# Altium PCB PCB3.PcbDoc (part 2 of 2)
Units mil, origin at the board's own origin, x right, y up, seen from the top; angles counter-clockwise.
Board outline 2978 x 3898 mil, 2 copper layers (Top Layer, Bottom Layer); 131 components, 87 nets, 395 pads, 3442 vias.
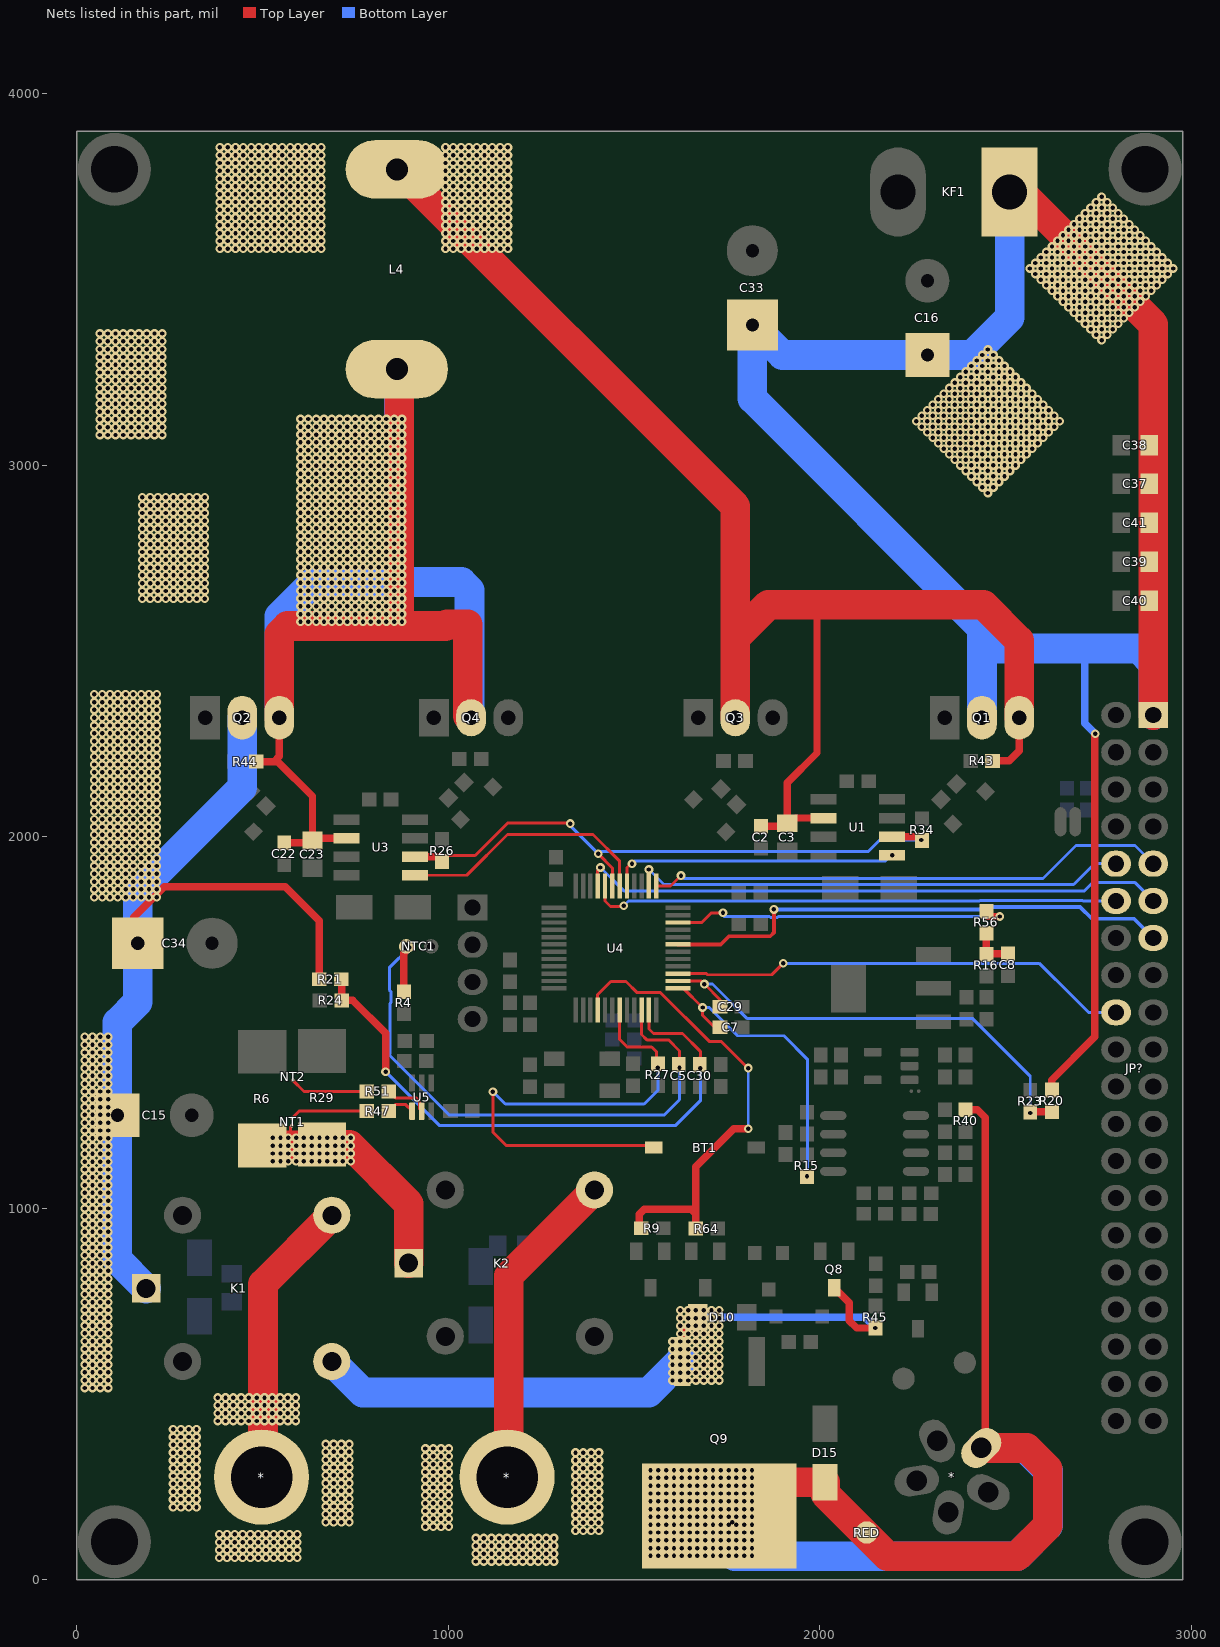
[diagram p2: the nets of this part, all layers, seen from the top]

## Via types
v1: diameter 23.62, hole 11.81, Top Layer to Bottom Layer, tented both sides, 2994 vias
v2: diameter 23.62, hole 11.81, Top Layer to Bottom Layer, 448 vias

## Nets (pads, with @x,y where several pads share a name; then routed paths per layer and width w, separated by ;. In a path a pad name is that pad's centre, name@x,y a point inside that pad or via, vN(x,y) a via of type N, cw(c..) or ccw(c..) an arc to the next point about the centre after c; other vN are vias at no path point) (continued)
POWER: C16.1 C33.1 C37.1 C38.1 C39.1 C40.1 C41.1 JP?.1 KF1.1 Q1.2 R20.1 | length 5920.8
  Top Layer w20: R20.1@2625,1318.06 2625,1345 2741,1461 2741,2276 v1(2742,2277) ; JP?.1@2898,2318 JP?.1@2898,2327
  Top Layer w80: KF1.1@2512,3765 2898,3379 JP?.1@2898,2327
  Bottom Layer w20: 2714,2506 2714,2305 v1(2742,2277)
  Bottom Layer w80: Q1.2@2437,2320 2437,2506 ; KF1.1@2512,3765 2512,3397 2411,3296 C16.1@2290.27,3296 1900,3296 C33.1@1819,3377 1819,3179 2437,2561 2437,2506 ; JP?.1@2898,2327 2898,2466 2858,2506 2714,2506 2437,2506
  other v1: 2453.04,2924.96 2438.19,2939.81 2467.89,2939.81 2423.34,2954.66 2453.04,2954.66 2482.74,2954.66 2408.49,2969.51 2438.19,2969.51 2467.89,2969.51 2497.59,2969.51 2393.64,2984.36 2423.34,2984.36 2453.04,2984.36 2482.74,2984.36 2512.44,2984.36 2378.79,2999.21 2408.49,2999.21 2438.19,2999.21 2467.89,2999.21 2497.59,2999.21 2527.29,2999.21 2363.94,3014.06 2393.64,3014.06 2423.34,3014.06 2453.04,3014.06 2482.74,3014.06 2512.44,3014.06 2542.14,3014.06 2349.1,3028.9 2378.79,3028.9 2408.49,3028.9 2438.19,3028.9 2467.89,3028.9 2497.59,3028.9 2527.29,3028.9 2556.98,3028.9 2334.25,3043.75 2363.94,3043.75 2393.64,3043.75 2423.34,3043.75 2453.04,3043.75 2482.74,3043.75 2512.44,3043.75 2542.14,3043.75 2571.83,3043.75 2319.4,3058.6 2349.1,3058.6 2378.79,3058.6 2408.49,3058.6 2438.19,3058.6 2467.89,3058.6 2497.59,3058.6 2527.29,3058.6 2556.98,3058.6 2586.68,3058.6 2304.55,3073.45 2334.25,3073.45 2363.94,3073.45 2393.64,3073.45 2423.34,3073.45 2453.04,3073.45 2482.74,3073.45 2512.44,3073.45 2542.14,3073.45 2571.83,3073.45 2601.53,3073.45 2289.7,3088.3 2319.4,3088.3 2349.1,3088.3 2378.79,3088.3 2408.49,3088.3 2438.19,3088.3 2467.89,3088.3 2497.59,3088.3 2527.29,3088.3 2556.98,3088.3 2586.68,3088.3 2616.38,3088.3 2274.85,3103.15 2304.55,3103.15 2334.25,3103.15 2363.94,3103.15 2393.64,3103.15 2423.34,3103.15 2453.04,3103.15 2482.74,3103.15 2512.44,3103.15 2542.14,3103.15 2571.83,3103.15 2601.53,3103.15 2631.23,3103.15 2260,3118 2260,3118 2289.7,3118 2319.4,3118 2349.1,3118 2378.79,3118 2408.49,3118 2438.19,3118 2467.89,3118 2497.59,3118 2527.29,3118 2556.98,3118 2586.68,3118 2616.38,3118 2646.08,3118 2274.85,3132.85 2274.85,3132.85 2304.55,3132.85 2334.25,3132.85 2363.94,3132.85 2393.64,3132.85 2423.34,3132.85 2453.04,3132.85 2482.74,3132.85 2512.44,3132.85 2542.14,3132.85 2571.83,3132.85 2601.53,3132.85 2631.23,3132.85 2289.7,3147.7 2289.7,3147.7 2319.4,3147.7 2349.1,3147.7 2378.79,3147.7 2408.49,3147.7 2438.19,3147.7 2467.89,3147.7 2497.59,3147.7 2527.29,3147.7 2556.98,3147.7 2586.68,3147.7 2616.38,3147.7 2304.55,3162.55 2304.55,3162.55 2334.25,3162.55 2363.94,3162.55 2393.64,3162.55 2423.34,3162.55 2453.04,3162.55 2482.74,3162.55 2512.44,3162.55 2542.14,3162.55 2571.83,3162.55 2601.53,3162.55 2319.4,3177.4 2319.4,3177.4 2349.1,3177.4 2378.79,3177.4 2408.49,3177.4 2438.19,3177.4 2467.89,3177.4 2497.59,3177.4 2527.29,3177.4 2556.98,3177.4 2586.68,3177.4 2334.25,3192.25 2334.25,3192.25 2363.94,3192.25 2393.64,3192.25 2423.34,3192.25 2453.04,3192.25 2482.74,3192.25 2512.44,3192.25 2542.14,3192.25 2571.83,3192.25 2349.1,3207.1 2349.1,3207.1 2378.79,3207.1 2408.49,3207.1 2438.19,3207.1 2467.89,3207.1 2497.59,3207.1 2527.29,3207.1 2556.98,3207.1 2363.94,3221.94 2363.94,3221.94 2393.64,3221.94 2423.34,3221.94 2453.04,3221.94 2482.74,3221.94 2512.44,3221.94 2542.14,3221.94 2378.79,3236.79 2378.79,3236.79 2408.49,3236.79 2438.19,3236.79 2467.89,3236.79 2497.59,3236.79 2527.29,3236.79 2393.64,3251.64 2393.64,3251.64 2423.34,3251.64 2453.04,3251.64 2482.74,3251.64 2512.44,3251.64 2408.49,3266.49 2408.49,3266.49 2438.19,3266.49 2467.89,3266.49 2497.59,3266.49 2423.34,3281.34 2423.34,3281.34 2453.04,3281.34 2482.74,3281.34 2438.19,3296.19 2438.19,3296.19 2467.89,3296.19 2453.04,3311.04 2453.04,3311.04 2759.04,3335.96 2744.19,3350.81 2773.89,3350.81 2729.34,3365.66 2759.04,3365.66 2788.74,3365.66 2714.49,3380.51 2744.19,3380.51 2773.89,3380.51 2803.59,3380.51 2699.64,3395.36 2729.34,3395.36 2759.04,3395.36 2788.74,3395.36 2818.44,3395.36 2684.79,3410.21 2714.49,3410.21 2744.19,3410.21 2773.89,3410.21 2803.59,3410.21 2833.29,3410.21 2669.94,3425.06 2699.64,3425.06 2729.34,3425.06 2759.04,3425.06 2788.74,3425.06 2818.44,3425.06 2848.14,3425.06 2655.1,3439.9 2684.79,3439.9 2714.49,3439.9 2744.19,3439.9 2773.89,3439.9 2803.59,3439.9 2833.29,3439.9 2862.98,3439.9 2640.25,3454.75 2669.94,3454.75 2699.64,3454.75 2729.34,3454.75 2759.04,3454.75 2788.74,3454.75 2818.44,3454.75 2848.14,3454.75 2877.83,3454.75 2625.4,3469.6 2655.1,3469.6 2684.79,3469.6 2714.49,3469.6 2744.19,3469.6 2773.89,3469.6 2803.59,3469.6 2833.29,3469.6 2862.98,3469.6 2892.68,3469.6 2610.55,3484.45 2640.25,3484.45 2669.94,3484.45 2699.64,3484.45 2729.34,3484.45 2759.04,3484.45 2788.74,3484.45 2818.44,3484.45 2848.14,3484.45 2877.83,3484.45 2907.53,3484.45 2595.7,3499.3 2625.4,3499.3 2655.1,3499.3 2684.79,3499.3 2714.49,3499.3 2744.19,3499.3 2773.89,3499.3 2803.59,3499.3 2833.29,3499.3 2862.98,3499.3 2892.68,3499.3 2922.38,3499.3 2580.85,3514.15 2610.55,3514.15 2640.25,3514.15 2669.94,3514.15 2699.64,3514.15 2729.34,3514.15 2759.04,3514.15 2788.74,3514.15 2818.44,3514.15 2848.14,3514.15 2877.83,3514.15 2907.53,3514.15 2937.23,3514.15 2566,3529 2566,3529 2595.7,3529 2625.4,3529 2655.1,3529 2684.79,3529 2714.49,3529 2744.19,3529 2773.89,3529 2803.59,3529 2833.29,3529 2862.98,3529 2892.68,3529 2922.38,3529 2952.08,3529 2580.85,3543.85 2580.85,3543.85 2610.55,3543.85 2640.25,3543.85 2669.94,3543.85 2699.64,3543.85 2729.34,3543.85 2759.04,3543.85 2788.74,3543.85 2818.44,3543.85 2848.14,3543.85 2877.83,3543.85 2907.53,3543.85 2937.23,3543.85 2595.7,3558.7 2595.7,3558.7 2625.4,3558.7 2655.1,3558.7 2684.79,3558.7 2714.49,3558.7 2744.19,3558.7 2773.89,3558.7 2803.59,3558.7 2833.29,3558.7 2862.98,3558.7 2892.68,3558.7 2922.38,3558.7 2610.55,3573.55 2610.55,3573.55 2640.25,3573.55 2669.94,3573.55 2699.64,3573.55 2729.34,3573.55 2759.04,3573.55 2788.74,3573.55 2818.44,3573.55 2848.14,3573.55 2877.83,3573.55 2907.53,3573.55 2625.4,3588.4 2625.4,3588.4 2655.1,3588.4 2684.79,3588.4 2714.49,3588.4 2744.19,3588.4 2773.89,3588.4 2803.59,3588.4 2833.29,3588.4 2862.98,3588.4 2892.68,3588.4 2640.25,3603.25 2640.25,3603.25 2669.94,3603.25 2699.64,3603.25 2729.34,3603.25 2759.04,3603.25 2788.74,3603.25 2818.44,3603.25 2848.14,3603.25 2877.83,3603.25 2655.1,3618.1 2655.1,3618.1 2684.79,3618.1 2714.49,3618.1 2744.19,3618.1 2773.89,3618.1 2803.59,3618.1 2833.29,3618.1 2862.98,3618.1 2669.94,3632.94 2669.94,3632.94 2699.64,3632.94 2729.34,3632.94 2759.04,3632.94 2788.74,3632.94 2818.44,3632.94 2848.14,3632.94 2684.79,3647.79 2684.79,3647.79 2714.49,3647.79 2744.19,3647.79 2773.89,3647.79 2803.59,3647.79 2833.29,3647.79 2699.64,3662.64 2699.64,3662.64 2729.34,3662.64 2759.04,3662.64 2788.74,3662.64 2818.44,3662.64 2714.49,3677.49 2714.49,3677.49 2744.19,3677.49 2773.89,3677.49 2803.59,3677.49 2729.34,3692.34 2729.34,3692.34 2759.04,3692.34 2788.74,3692.34 2744.19,3707.19 2744.19,3707.19 2773.89,3707.19 2759.04,3722.04 2759.04,3722.04
Power+: *.1@498.06,276 K1.NC | length 813.8
  Top Layer w80: *.1@524.84,253.16 502,276 502,795.69 K1.NC@687.16,980.85
  other v1: 384,59 405,59 426,59 447,59 468,59 489,59 510,59 531,59 552,59 573,59 594,59 384,80 405,80 426,80 447,80 468,80 489,80 510,80 531,80 552,80 573,80 594,80 384,101 405,101 426,101 447,101 468,101 489,101 510,101 531,101 552,101 573,101 594,101 384,122 405,122 426,122 447,122 468,122 489,122 510,122 531,122 552,122 573,122 594,122 671,155 692,155 713,155 734,155 671,176 692,176 713,176 734,176 260,195 281,195 302,195 323,195 671,197 692,197 713,197 734,197 260,216 281,216 302,216 323,216 671,218 692,218 713,218 734,218 260,237 281,237 302,237 323,237 671,239 692,239 713,239 734,239 260,258 281,258 302,258 323,258 671,260 692,260 713,260 734,260 260,279 281,279 302,279 323,279 671,281 692,281 713,281 734,281 260,300 281,300 302,300 323,300 671,302 692,302 713,302 734,302 260,321 281,321 302,321 323,321 671,323 692,323 713,323 734,323 260,342 281,342 302,342 323,342 671,344 692,344 713,344 734,344 260,363 281,363 302,363 323,363 671,365 692,365 713,365 734,365 260,384 281,384 302,384 323,384 260,405 281,405 302,405 323,405 380,427 401,427 422,427 443,427 464,427 485,427 506,427 527,427 548,427 569,427 590,427 380,448 401,448 422,448 443,448 464,448 485,448 506,448 527,448 548,448 569,448 590,448 380,469 401,469 422,469 443,469 464,469 485,469 506,469 527,469 548,469 569,469 590,469 380,490 401,490 422,490 443,490 464,490 485,490 506,490 527,490 548,490 569,490 590,490
Power-: *.1@1159.06,276 K2.NC | length 870.8
  Top Layer w80: *.1@1163,238.16 *.1@1164.58,239.74 ; *.1@1163,276 1163,817.69 K2.NC@1394.16,1048.85
  other v1: 1075,49 1096,49 1117,49 1138,49 1159,49 1180,49 1201,49 1222,49 1243,49 1264,49 1285,49 1075,70 1096,70 1117,70 1138,70 1159,70 1180,70 1201,70 1222,70 1243,70 1264,70 1285,70 1075,91 1096,91 1117,91 1138,91 1159,91 1180,91 1201,91 1222,91 1243,91 1264,91 1285,91 1075,112 1096,112 1117,112 1138,112 1159,112 1180,112 1201,112 1222,112 1243,112 1264,112 1285,112 1343,132 1364,132 1385,132 1406,132 939,143 960,143 981,143 1002,143 1343,153 1364,153 1385,153 1406,153 939,164 960,164 981,164 1002,164 1343,174 1364,174 1385,174 1406,174 939,185 960,185 981,185 1002,185 1343,195 1364,195 1385,195 1406,195 939,206 960,206 981,206 1002,206 1343,216 1364,216 1385,216 1406,216 939,227 960,227 981,227 1002,227 1343,237 1364,237 1385,237 1406,237 939,248 960,248 981,248 1002,248 1343,258 1364,258 1385,258 1406,258 939,269 960,269 981,269 1002,269 1343,279 1364,279 1385,279 1406,279 939,290 960,290 981,290 1002,290 1343,300 1364,300 1385,300 1406,300 939,311 960,311 981,311 1002,311 1343,321 1364,321 1385,321 1406,321 939,332 960,332 981,332 1002,332 1343,342 1364,342 1385,342 1406,342 939,353 960,353 981,353 1002,353
PowerSolider+: D10.2 K1.NO Q8.3 Q9.3 R45.2 | length 1821.5
  Top Layer w20: Q9.3@1630.35,587.08 1630.35,664.24 D10.2@1672.11,706 ; Q8.3@2039.8,785.79 2080,745.59 2080,697 2099.53,677.47 v1(2150,677.47)
  Bottom Layer w20: v2@1672.11,706 2121.47,706 v1(2150,677.47)
  Bottom Layer w80: K1.NO@687.16,587.15 770.31,504 1540,504 1623.08,587.08 v2@1630.35,587.08
  other v2: 1604,536 1625,536 1646,536 1667,536 1667,536 1688,536 1709,536 1730,536 1604,557 1625,557 1646,557 1667,557 1667,557 1688,557 1709,557 1730,557 1604,578 1625,578 1646,578 1667,578 1667,578 1688,578 1709,578 1730,578 1604,599 1625,599 1646,599 1667,599 1667,599 1688,599 1709,599 1730,599 1604,620 1625,620 1625,620 1646,620 1646,620 1667,620 1667,620 1667,620 1667,620 1688,620 1688,620 1688,620 1709,620 1709,620 1730,620 1730,620 1604,641 1625,641 1625,641 1646,641 1646,641 1667,641 1667,641 1667,641 1667,641 1688,641 1688,641 1688,641 1709,641 1709,641 1730,641 1730,641 1625,662 1646,662 1667,662 1667,662 1688,662 1688,662 1709,662 1730,662 1625,683 1646,683 1667,683 1667,683 1688,683 1688,683 1709,683 1730,683 1625,704 1646,704 1667,704 1667,704 1688,704 1688,704 1709,704 1730,704 1625,725 1646,725 1667,725 1667,725 1688,725 1688,725 1709,725 1730,725
Red: *.1@2435.02,354.54 D15.2 Q9.2 R40.2 RED.1 | length 3692.4
  Top Layer w20: R40.2@2393,1265 2425,1265 2446,1244 2446,365.52 *.1@2435.02,354.54
  Top Layer w80: Q9.2@1730.35,170.88 1821.73,262.26 D15.2@2015,262.26 2015,231 2183,63 2532,63 2614,145 2614,298 2557.46,354.54 *.1@2435.02,354.54
  Bottom Layer w80: v1(1764.45,154.98) 1764.45,144.55 1772,137 1772,63 2532,63 2615,146 2615,293 2553.46,354.54 *.1@2435.02,354.54
  other v1: 1545,64 1566,64 1587,64 1608,64 1629,64 1650,64 1671,64 1692,64 1713,64 1734,64 1755,64 1776,64 1797,64 1818,64 1545,85 1566,85 1587,85 1608,85 1629,85 1650,85 1671,85 1692,85 1713,85 1734,85 1755,85 1776,85 1797,85 1818,85 1545,106 1566,106 1587,106 1608,106 1629,106 1650,106 1671,106 1692,106 1713,106 1734,106 1755,106 1776,106 1797,106 1818,106 1545,127 1566,127 1587,127 1608,127 1629,127 1650,127 1671,127 1692,127 1713,127 1734,127 1755,127 1776,127 1797,127 1818,127 1545,148 1566,148 1587,148 1608,148 1629,148 1650,148 1671,148 1692,148 1713,148 1734,148 1755,148 1776,148 1797,148 1818,148 1545,169 1566,169 1587,169 1608,169 1629,169 1650,169 1671,169 1692,169 1713,169 1734,169 1755,169 1776,169 1797,169 1818,169 1545,190 1566,190 1587,190 1608,190 1629,190 1650,190 1671,190 1692,190 1713,190 1734,190 1755,190 1776,190 1797,190 1818,190 1545,211 1566,211 1587,211 1608,211 1629,211 1650,211 1671,211 1692,211 1713,211 1734,211 1755,211 1776,211 1797,211 1818,211 1545,232 1566,232 1587,232 1608,232 1629,232 1650,232 1671,232 1692,232 1713,232 1734,232 1755,232 1776,232 1797,232 1818,232 1545,253 1566,253 1587,253 1608,253 1629,253 1650,253 1671,253 1692,253 1713,253 1734,253 1755,253 1776,253 1797,253 1818,253 1545,274 1566,274 1587,274 1608,274 1629,274 1650,274 1671,274 1692,274 1713,274 1734,274 1755,274 1776,274 1797,274 1818,274 1545,295 1545,295 1566,295 1566,295 1587,295 1587,295 1608,295 1608,295 1629,295 1629,295 1650,295 1650,295 1671,295 1671,295 1692,295 1692,295 1713,295 1713,295 1734,295 1734,295 1755,295 1755,295 1776,295 1776,295 1797,295 1797,295 1818,295 1818,295
RESET: JP?.7 U4.19 | length 1392
  Top Layer w10: U4.19@1618.85,1709.84 1734,1709.84 1755.97,1731.81 1772.18,1731.81 1772.37,1732 1867,1732 1877,1742 v1(1877,1804)
  Bottom Layer w10: v1(1877,1804) 2431.74,1804 2438.55,1810.81 2457.45,1810.81 2701.19,1810.81 2733,1779 2793,1779 2803,1779 2846,1779 JP?.7@2898,1727
RST: BT1.1 R27.1 U4.7 | length 1330.4
  Top Layer w8: v1(1120.77,1313.22) 1120.77,1204.23 1156,1169 1547.41,1169 BT1.1@1553.41,1163 ; U4.7@1461.84,1533.15 1461.84,1454.16 1482,1434 1548,1434 1561,1421 1561,1392.53 R27.1@1565,1388.53 1565,1379 v1(1564,1378)
  Bottom Layer w8: v1(1120.77,1313.22) 1154,1280 1528,1280 1565,1317 1565,1377 v1(1564,1378)
S_N: NT2.2 R51.1 | length 212
  Top Layer w8: NT2.2@582,1344.32 612.32,1314 R51.1@781.47,1314
S_P: NT1.2 R47.1 | length 209.3
  Top Layer w8: NT1.2@580,1242 599,1261 R47.1@781.47,1261
S_sense: C8.2 R16.1 R56.1 | length 114.7
  Top Layer w20: R56.1@2449,1740.07 R16.1@2449,1683.72 2449.8,1684.53 C8.2@2507,1684.53
SCK: JP?.32 U4.15 | length 1247.8
  Top Layer w8: U4.15@1618.85,1631.1 1695.09,1631.1 1698,1628.19 1871.19,1628.19 v1(1902,1659)
  Bottom Layer w8: v1(1902,1659) 2591,1659 2634,1616 2634.8,1616 2723.8,1527 JP?.32@2798,1527
SD: R26.2 R34.2 U1.2 U3.2 U4.31 | length 1629.3
  Top Layer w8: R26.2@984,1943.47 989.53,1949 1073,1949 1161,2037 1327,2037 v1(1329,2035) ; v1(1404,1954) 1442.16,1915.84 U4.31@1442.16,1866.85
  Top Layer w20: U3.2@911,1946 981.47,1946 R26.2@984,1943.47 ; U1.2@2195.13,2000 R34.2@2265.47,2000
  Bottom Layer w8: v1(1329,2035) 1329,2029 v1(1404,1954) 1410,1960 2131,1960 2162,1991 v1(2274,1991)
SO_N: R51.2 U5.5 | length 123.1
  Top Layer w8: R51.2@840.53,1314 858.03,1296.5 891.59,1296.5 891.72,1296.63 915.1,1296.63 923.28,1288.45 923.28,1266.92 U5.5@929,1261.2
SO_P: R47.2 U5.4 | length 77.3
  Top Layer w8: R47.2@840.53,1261 858.03,1278.5 886.11,1278.5 U5.4@903.41,1261.2
stand_inp: R56.2 U4.22 | length 948.4
  Top Layer w8: U4.22@1618.85,1768.9 1676.24,1768.9 1682.9,1768.9 1709,1795 v1(1740,1795)
  Top Layer w20: v1(2485,1785) 2453,1785 R56.2@2449,1789 ; R56.2@2449,1789 R56.2@2449,1799.12 2448,1798.12 2448,1788 R56.2@2449,1789
  Bottom Layer w8: v1@1740,1787.81 v1(1740,1795) ; v1@1740.03,1787.81 1742.85,1785 1865.15,1785 1867.97,1782.19 1886.03,1782.19 1888.85,1785 v1(2485,1785)
switch: R9.2 R64.2 U4.4 | length 1273.7
  Top Layer w8: U4.4@1402.79,1533.15 1402.79,1574.79 1438,1610 1479,1610 1509,1580 1572,1580 1703,1449 1734.65,1449 1806.65,1377 v1(1808,1377)
  Top Layer w20: R9.2@1520.47,946 1515,951.47 1515,984 1528,997 1654,997 1666.47,984.53 ; R64.2@1666.47,945 1666.47,984.53 ; v1(1808,1214) 1769,1214 1666.47,1111.47 1666.47,984.53
  Bottom Layer w8: v1(1808,1214) v1(1808,1377)
T_CS: JP?.5 U4.25 | length 1409.9
  Top Layer w8: U4.25@1560.27,1866.85 1598.85,1866.85 v1(1627,1895)
  Bottom Layer w8: v1(1627,1895) 1635,1887 2601,1887 2690,1976 2849,1976 JP?.5@2898,1927
T_IRQ: JP?.36 U4.26 | length 1342.7
  Top Layer w8: U4.26@1540.58,1866.85 1540.58,1910.42 1540,1911 v1(1540.58,1911.6)
  Bottom Layer w8: v1(1540.58,1911.6) 1581.18,1871 2101,1871 2684,1871 2740,1927 JP?.36@2798,1927
temp_fet: C5.2 NTC1.2 R4.2 U4.10 | length 1624.1
  Top Layer w8: U4.10@1520.9,1533.15 1520.9,1467.1 1535,1453 1593,1453 1623,1423 1623,1406.21 1621,1404.21 C5.2@1621,1386.53 1623,1384.53 v1(1623,1378)
  Top Layer w20: R4.2@881,1582.53 881,1686.22 v1(896.27,1701.48)
  Bottom Layer w8: v1(896.27,1701.48) 842,1647.22 842,1586.64 845.81,1582.83 845.81,1553.17 844,1551.36 844,1414.92 842,1412.92 842,1412 1003,1251 1582,1251 1623,1292 v1(1623,1378)
temp_solid: C7.2 R15.2 U4.13 | length 824.3
  Top Layer w8: U4.13@1618.85,1591.73 1633.27,1591.73 v1(1685,1540) 1685,1519 1717,1487 C7.2@1731.94,1487
  Bottom Layer w8: v1(1685,1540) 1703,1540 1779,1464 1904,1464 1967,1401 1967,1086.45 v1(1965.99,1085.43)
TIM1_CH1: U1.1 U4.29 | length 777.1
  Top Layer w8: U4.29@1481.53,1866.85 1481.53,1916.53 1492,1927 v1(1495,1927)
  Bottom Layer w8: v1(1495,1927) 1502,1934 2176,1934 2192,1950 v1(2195.13,1950)
TIM1_CH2: U3.1 U4.30 | length 693.4
  Top Layer w8: U3.1@911,1896 1050,1896 1160,2006 1389.84,2006 1461.84,1934 U4.30@1461.84,1866.85
USB_N: JP?.35 U4.32 | length 1428.8
  Top Layer w8: U4.32@1422.47,1866.85 1422.47,1826.53 1437,1812 1471,1812 v1(1473,1814)
  Bottom Layer w8: v1(1473,1814) 1486,1827 2430.7,1827 2431.51,1827.81 2450.41,1827.81 2708.23,1827.81 2709.04,1827 JP?.35@2798,1827
USB_P: JP?.6 U4.33 | length 1598.1
  Top Layer w8: U4.33@1402.79,1866.85 1402.79,1902.83 1402,1903.62 1402,1909 v1(1410,1917)
  Bottom Layer w8: v1(1410,1917) 1473,1854 2713,1854 2736,1877 2848,1877 JP?.6@2898,1827
vin_sense: C29.2 R20.2 R23.1 U4.14 | length 1288.7
  Top Layer w8: U4.14@1618.85,1611.42 1681.58,1611.42 v1(1690,1603) 1731.94,1561.06 C29.2@1731.94,1542
  Top Layer w20: R23.1@2568,1259 R20.2@2625,1259
  Bottom Layer w8: v1(1690,1603) 1712,1603 1804,1511 2411,1511 2567,1355 v1(2567,1256)
Vout_N: K2.COM NT1.1 R6.2 R29.2 | length 675.7
  Top Layer w8: v2@576,1169.02 576,1218.32 NT1.1@580,1222.32
  Top Layer w80: R6.2@500,1169.02 576,1169.02 659,1169.02 R29.2@661,1171.02 734.98,1171.02 894.16,1011.84 K2.COM@894.16,852
  other v2: 528,1126 549,1126 570,1126 591,1126 612,1126 633,1126 633,1126 654,1126 675,1126 696,1126 717,1126 738,1126 528,1147 549,1147 570,1147 591,1147 612,1147 633,1147 633,1147 654,1147 675,1147 696,1147 717,1147 738,1147 528,1168 549,1168 570,1168 591,1168 612,1168 633,1168 633,1168 654,1168 675,1168 696,1168 717,1168 738,1168 528,1189 549,1189 570,1189 591,1189 612,1189 633,1189 633,1189 654,1189 675,1189 696,1189 717,1189 738,1189
Vout_P: C15.1 C34.1 K1.COM Q2.2 R21.1 | length 2510.5
  Top Layer w20: C34.1@165,1713 154,1724 154,1783 236,1865 562,1865 653.47,1773.53 R21.1@653.47,1616
  Bottom Layer w80: K1.COM@187.16,784 110,861.16 C15.1@110,1250 110,1500 165,1555 C34.1@165,1713 165,1851 446,2132 Q2.2@446,2320
  other v1: 22,516 43,516 64,516 85,516 22,537 43,537 64,537 85,537 22,558 43,558 64,558 85,558 22,579 43,579 64,579 85,579 22,600 43,600 64,600 85,600 22,621 43,621 64,621 85,621 22,642 43,642 64,642 85,642 22,663 43,663 64,663 85,663 22,684 43,684 64,684 85,684 22,705 43,705 64,705 85,705 22,726 43,726 64,726 85,726 22,747 43,747 64,747 85,747 22,768 43,768 64,768 85,768 22,789 22,789 22,789 43,789 43,789 43,789 64,789 64,789 64,789 85,789 85,789 85,789 22,810 43,810 64,810 85,810 22,831 43,831 64,831 85,831 22,852 43,852 64,852 85,852 22,873 43,873 64,873 85,873 22,894 43,894 64,894 85,894 22,915 22,915 43,915 43,915 64,915 64,915 85,915 85,915 22,936 22,936 43,936 43,936 64,936 64,936 85,936 85,936 22,957 22,957 43,957 43,957 64,957 64,957 85,957 85,957 22,978 22,978 43,978 43,978 64,978 64,978 85,978 85,978 22,999 22,999 43,999 43,999 64,999 64,999 85,999 85,999 22,1020 22,1020 43,1020 43,1020 64,1020 64,1020 85,1020 85,1020 22,1041 22,1041 43,1041 43,1041 64,1041 64,1041 85,1041 85,1041 22,1062 22,1062 22,1062 43,1062 43,1062 43,1062 64,1062 64,1062 64,1062 85,1062 85,1062 85,1062 22,1083 43,1083 64,1083 85,1083 22,1104 43,1104 64,1104 85,1104 22,1125 43,1125 64,1125 85,1125 22,1146 43,1146 64,1146 85,1146 22,1167 43,1167 64,1167 85,1167 22,1188 22,1188 22,1188 43,1188 43,1188 43,1188 64,1188 64,1188 64,1188 85,1188 85,1188 85,1188 22,1209 43,1209 64,1209 85,1209 22,1230 43,1230 64,1230 85,1230 22,1251 43,1251 64,1251 85,1251 22,1272 43,1272 64,1272 85,1272 22,1293 43,1293 64,1293 85,1293 22,1314 43,1314 64,1314 85,1314 22,1335 43,1335 64,1335 85,1335 22,1356 43,1356 64,1356 85,1356 22,1377 43,1377 64,1377 85,1377 22,1398 43,1398 64,1398 85,1398 22,1419 43,1419 64,1419 85,1419 22,1440 43,1440 64,1440 85,1440 22,1461 22,1461 43,1461 43,1461 64,1461 64,1461 85,1461 85,1461 48,1837 69,1837 90,1837 111,1837 132,1837 153,1837 174,1837 195,1837 216,1837 48,1858 69,1858 90,1858 111,1858 132,1858 153,1858 174,1858 195,1858 216,1858 48,1879 69,1879 90,1879 111,1879 132,1879 153,1879 174,1879 195,1879 216,1879 48,1900 69,1900 90,1900 111,1900 132,1900 153,1900 174,1900 195,1900 216,1900 48,1921 69,1921 90,1921 111,1921 132,1921 153,1921 174,1921 195,1921 216,1921 48,1942 69,1942 90,1942 111,1942 132,1942 153,1942 174,1942 195,1942 216,1942 48,1963 69,1963 90,1963 111,1963 132,1963 153,1963 174,1963 195,1963 216,1963 48,1984 69,1984 90,1984 111,1984 132,1984 153,1984 174,1984 195,1984 216,1984 48,2005 69,2005 90,2005 111,2005 132,2005 153,2005 174,2005 195,2005 216,2005 48,2026 69,2026 90,2026 111,2026 132,2026 153,2026 174,2026 195,2026 216,2026 48,2047 69,2047 90,2047 111,2047 132,2047 153,2047 174,2047 195,2047 216,2047 48,2068 69,2068 90,2068 111,2068 132,2068 153,2068 174,2068 195,2068 216,2068 48,2089 69,2089 90,2089 111,2089 132,2089 153,2089 174,2089 195,2089 216,2089 48,2110 48,2110 48,2110 69,2110 69,2110 69,2110 90,2110 90,2110 90,2110 111,2110 111,2110 111,2110 132,2110 132,2110 132,2110 153,2110 153,2110 153,2110 174,2110 174,2110 174,2110 195,2110 195,2110 195,2110 216,2110 216,2110 216,2110 48,2131 69,2131 90,2131 111,2131 132,2131 153,2131 174,2131 195,2131 216,2131 48,2152 69,2152 90,2152 111,2152 132,2152 153,2152 174,2152 195,2152 216,2152 48,2173 69,2173 90,2173 111,2173 132,2173 153,2173 174,2173 195,2173 216,2173 48,2194 69,2194 90,2194 111,2194 132,2194 153,2194 174,2194 195,2194 216,2194 48,2215 69,2215 90,2215 111,2215 132,2215 153,2215 174,2215 195,2215 216,2215 48,2236 69,2236 90,2236 111,2236 132,2236 153,2236 174,2236 195,2236 216,2236 48,2257 69,2257 90,2257 111,2257 132,2257 153,2257 174,2257 195,2257 216,2257 48,2278 69,2278 90,2278 111,2278 132,2278 153,2278 174,2278 195,2278 216,2278 48,2299 69,2299 90,2299 111,2299 132,2299 153,2299 174,2299 195,2299 216,2299 48,2320 69,2320 90,2320 111,2320 132,2320 153,2320 174,2320 195,2320 216,2320 48,2341 69,2341 90,2341 111,2341 132,2341 153,2341 174,2341 195,2341 216,2341 48,2362 69,2362 90,2362 111,2362 132,2362 153,2362 174,2362 195,2362 216,2362 48,2383 48,2383 69,2383 69,2383 90,2383 90,2383 111,2383 111,2383 132,2383 132,2383 153,2383 153,2383 174,2383 174,2383 195,2383 195,2383 216,2383 216,2383 177,2640 198,2640 219,2640 240,2640 261,2640 282,2640 303,2640 324,2640 345,2640 177,2661 198,2661 219,2661 240,2661 261,2661 282,2661 303,2661 324,2661 345,2661 177,2682 198,2682 219,2682 240,2682 261,2682 282,2682 303,2682 324,2682 345,2682 177,2703 198,2703 219,2703 240,2703 261,2703 282,2703 303,2703 324,2703 345,2703 177,2724 198,2724 219,2724 240,2724 261,2724 282,2724 303,2724 324,2724 345,2724 177,2745 198,2745 219,2745 240,2745 261,2745 282,2745 303,2745 324,2745 345,2745 177,2766 198,2766 219,2766 240,2766 261,2766 282,2766 303,2766 324,2766 345,2766 177,2787 198,2787 219,2787 240,2787 261,2787 282,2787 303,2787 324,2787 345,2787 177,2808 198,2808 219,2808 240,2808 261,2808 282,2808 303,2808 324,2808 345,2808 177,2829 198,2829 219,2829 240,2829 261,2829 282,2829 303,2829 324,2829 345,2829 177,2850 198,2850 219,2850 240,2850 261,2850 282,2850 303,2850 324,2850 345,2850 177,2871 198,2871 219,2871 240,2871 261,2871 282,2871 303,2871 324,2871 345,2871 177,2892 198,2892 219,2892 240,2892 261,2892 282,2892 303,2892 324,2892 345,2892 177,2913 177,2913 198,2913 198,2913 219,2913 219,2913 240,2913 240,2913 261,2913 261,2913 282,2913 282,2913 303,2913 303,2913 324,2913 324,2913 345,2913 345,2913 63,3081 84,3081 105,3081 126,3081 147,3081 168,3081 189,3081 210,3081 231,3081 63,3102 84,3102 105,3102 126,3102 147,3102 168,3102 189,3102 210,3102 231,3102 63,3123 84,3123 105,3123 126,3123 147,3123 168,3123 189,3123 210,3123 231,3123 63,3144 84,3144 105,3144 126,3144 147,3144 168,3144 189,3144 210,3144 231,3144 63,3165 84,3165 105,3165 126,3165 147,3165 168,3165 189,3165 210,3165 231,3165 63,3186 84,3186 105,3186 126,3186 147,3186 168,3186 189,3186 210,3186 231,3186 63,3207 84,3207 105,3207 126,3207 147,3207 168,3207 189,3207 210,3207 231,3207 63,3228 84,3228 105,3228 126,3228 147,3228 168,3228 189,3228 210,3228 231,3228 63,3249 84,3249 105,3249 126,3249 147,3249 168,3249 189,3249 210,3249 231,3249 63,3270 84,3270 105,3270 126,3270 147,3270 168,3270 189,3270 210,3270 231,3270 63,3291 84,3291 105,3291 126,3291 147,3291 168,3291 189,3291 210,3291 231,3291 63,3312 84,3312 105,3312 126,3312 147,3312 168,3312 189,3312 210,3312 231,3312 63,3333 84,3333 105,3333 126,3333 147,3333 168,3333 189,3333 210,3333 231,3333 63,3354 63,3354 84,3354 84,3354 105,3354 105,3354 126,3354 126,3354 147,3354 147,3354 168,3354 168,3354 189,3354 189,3354 210,3354 210,3354 231,3354 231,3354
vout_sense: C30.2 R21.2 R24.1 U4.11 | length 1602.5
  Top Layer w8: U4.11@1540.58,1533.15 1540.58,1482.42 1553,1470 1631,1470 1679,1422 1679,1406.21 1677.5,1404.71 C30.2@1677.5,1386.53 1679,1385.03 v1(1679,1377)
  Top Layer w20: R21.2@712.53,1620 714,1618.53 R24.1@714,1559 744,1559 832,1471 v1(832,1367)
  Bottom Layer w8: v1(832,1367) 976,1223 1613,1223 1679,1289 v1(1679,1377)
VS1: C2.1 C3.2 L4.1 Q1.3 Q3.2 R43.2 U1.6 | length 3889.7
  Top Layer w20: C2.1@1842,2027.53 C3.2@1913.13,2027.53 ; 1966,2624 1993,2597 1993,2225 1913.13,2145.13 C3.2@1913.13,2035.57 C3.2@1913.13,2027.53 ; U1.6@2010.87,2050 1935.61,2050 C3.2@1913.13,2027.53 ; R43.2@2465.53,2204 2510,2204 2537,2231 Q1.3@2537,2320
  Top Layer w80: L4.1@867,3795.6 1773.33,2889.27 1773.33,2535.33 ; Q3.2@1773.33,2320 1773.33,2535.33 ; Q1.3@2537,2320 2537,2528 2441,2624 1966,2624 1862,2624 1773.33,2535.33
  other v1: 386,3582 407,3582 428,3582 449,3582 470,3582 491,3582 512,3582 533,3582 554,3582 575,3582 596,3582 617,3582 638,3582 659,3582 993,3582 1014,3582 1035,3582 1056,3582 1077,3582 1098,3582 1119,3582 1140,3582 1161,3582 386,3603 407,3603 428,3603 449,3603 470,3603 491,3603 512,3603 533,3603 554,3603 575,3603 596,3603 617,3603 638,3603 659,3603 993,3603 1014,3603 1035,3603 1056,3603 1077,3603 1098,3603 1119,3603 1140,3603 1161,3603 386,3624 407,3624 428,3624 449,3624 470,3624 491,3624 512,3624 533,3624 554,3624 575,3624 596,3624 617,3624 638,3624 659,3624 993,3624 1014,3624 1035,3624 1056,3624 1077,3624 1098,3624 1119,3624 1140,3624 1161,3624 386,3645 407,3645 428,3645 449,3645 470,3645 491,3645 512,3645 533,3645 554,3645 575,3645 596,3645 617,3645 638,3645 659,3645 993,3645 1014,3645 1035,3645 1056,3645 1077,3645 1098,3645 1119,3645 1140,3645 1161,3645 386,3666 407,3666 428,3666 449,3666 470,3666 491,3666 512,3666 533,3666 554,3666 575,3666 596,3666 617,3666 638,3666 659,3666 993,3666 1014,3666 1035,3666 1056,3666 1077,3666 1098,3666 1119,3666 1140,3666 1161,3666 386,3687 407,3687 428,3687 449,3687 470,3687 491,3687 512,3687 533,3687 554,3687 575,3687 596,3687 617,3687 638,3687 659,3687 993,3687 1014,3687 1035,3687 1056,3687 1077,3687 1098,3687 1119,3687 1140,3687 1161,3687 386,3708 407,3708 428,3708 449,3708 470,3708 491,3708 512,3708 533,3708 554,3708 575,3708 596,3708 617,3708 638,3708 659,3708 993,3708 1014,3708 1035,3708 1056,3708 1077,3708 1098,3708 1119,3708 1140,3708 1161,3708 386,3729 407,3729 428,3729 449,3729 470,3729 491,3729 512,3729 533,3729 554,3729 575,3729 596,3729 617,3729 638,3729 659,3729 993,3729 1014,3729 1035,3729 1056,3729 1077,3729 1098,3729 1119,3729 1140,3729 1161,3729 386,3750 407,3750 428,3750 449,3750 470,3750 491,3750 512,3750 533,3750 554,3750 575,3750 596,3750 617,3750 638,3750 659,3750 993,3750 1014,3750 1035,3750 1056,3750 1077,3750 1098,3750 1119,3750 1140,3750 1161,3750 386,3771 407,3771 428,3771 449,3771 470,3771 491,3771 512,3771 533,3771 554,3771 575,3771 596,3771 617,3771 638,3771 659,3771 993,3771 1014,3771 1035,3771 1056,3771 1077,3771 1098,3771 1119,3771 1140,3771 1161,3771 386,3792 407,3792 428,3792 449,3792 470,3792 491,3792 512,3792 533,3792 554,3792 575,3792 596,3792 617,3792 638,3792 659,3792 993,3792 1014,3792 1035,3792 1056,3792 1077,3792 1098,3792 1119,3792 1140,3792 1161,3792 386,3813 407,3813 428,3813 449,3813 470,3813 491,3813 512,3813 533,3813 554,3813 575,3813 596,3813 617,3813 638,3813 659,3813 993,3813 1014,3813 1035,3813 1056,3813 1077,3813 1098,3813 1119,3813 1140,3813 1161,3813 386,3834 407,3834 428,3834 449,3834 470,3834 491,3834 512,3834 533,3834 554,3834 575,3834 596,3834 617,3834 638,3834 659,3834 993,3834 1014,3834 1035,3834 1056,3834 1077,3834 1098,3834 1119,3834 1140,3834 1161,3834 386,3855 386,3855 407,3855 407,3855 428,3855 428,3855 449,3855 449,3855 470,3855 470,3855 491,3855 491,3855 512,3855 512,3855 533,3855 533,3855 554,3855 554,3855 575,3855 575,3855 596,3855 596,3855 617,3855 617,3855 638,3855 638,3855 659,3855 659,3855 993,3855 993,3855 1014,3855 1014,3855 1035,3855 1035,3855 1056,3855 1056,3855 1077,3855 1077,3855 1098,3855 1098,3855 1119,3855 1119,3855 1140,3855 1140,3855 1161,3855 1161,3855
VS2: C22.1 C23.2 L4.2 Q2.3 Q4.2 R44.1 U3.6 | length 4025.2
  Top Layer w20: R44.1@483.53,2202 532,2202 ; Q2.3@546,2320 546,2216 532,2202 ; C22.1@559,1983 C23.2@635.13,1983 ; U3.6@726.75,1996 707.41,1996 641.56,1996 C23.2@635.13,1989.57 635.13,2108.87 542,2202 532,2202
  Top Layer w80: Q2.3@546,2320 546,2545 568,2567 868.94,2567 ; L4.2@867,3258 868.94,3256.06 868.94,2567 ; Q4.2@1053,2324.83 1053,2571 997,2571 993,2567 868.94,2567
  Bottom Layer w80: Q2.3@546,2320 546,2593 638,2685 v1@867,2685 ; L4.2@867,3258 v1@867,2685 ; Q4.2@1058,2327.47 1058,2663 1036,2685 v1@867,2685
  other v1: 603,2578 624,2578 645,2578 666,2578 687,2578 708,2578 729,2578 750,2578 771,2578 792,2578 813,2578 834,2578 855,2578 876,2578 603,2599 624,2599 645,2599 666,2599 687,2599 708,2599 729,2599 750,2599 771,2599 792,2599 813,2599 834,2599 855,2599 876,2599 603,2620 624,2620 645,2620 666,2620 687,2620 708,2620 729,2620 750,2620 771,2620 792,2620 813,2620 834,2620 855,2620 876,2620 603,2641 624,2641 645,2641 666,2641 687,2641 708,2641 729,2641 750,2641 771,2641 792,2641 813,2641 834,2641 855,2641 876,2641 603,2662 624,2662 645,2662 666,2662 687,2662 708,2662 729,2662 750,2662 771,2662 792,2662 813,2662 834,2662 855,2662 876,2662 603,2683 624,2683 645,2683 666,2683 687,2683 708,2683 729,2683 750,2683 771,2683 792,2683 813,2683 834,2683 855,2683 876,2683 603,2704 624,2704 645,2704 666,2704 687,2704 708,2704 729,2704 750,2704 771,2704 792,2704 813,2704 834,2704 855,2704 876,2704 603,2725 624,2725 645,2725 666,2725 687,2725 708,2725 729,2725 750,2725 771,2725 792,2725 813,2725 834,2725 855,2725 876,2725 603,2746 624,2746 645,2746 666,2746 687,2746 708,2746 729,2746 750,2746 771,2746 792,2746 813,2746 834,2746 855,2746 876,2746 603,2767 624,2767 645,2767 666,2767 687,2767 708,2767 729,2767 750,2767 771,2767 792,2767 813,2767 834,2767 855,2767 876,2767 603,2788 624,2788 645,2788 666,2788 687,2788 708,2788 729,2788 750,2788 771,2788 792,2788 813,2788 834,2788 855,2788 876,2788 603,2809 624,2809 645,2809 666,2809 687,2809 708,2809 729,2809 750,2809 771,2809 792,2809 813,2809 834,2809 855,2809 876,2809 603,2830 624,2830 645,2830 666,2830 687,2830 708,2830 729,2830 750,2830 771,2830 792,2830 813,2830 834,2830 855,2830 876,2830 603,2851 603,2851 603,2851 624,2851 624,2851 624,2851 645,2851 645,2851 645,2851 666,2851 666,2851 666,2851 687,2851 687,2851 687,2851 708,2851 708,2851 708,2851 729,2851 729,2851 729,2851 750,2851 750,2851 750,2851 771,2851 771,2851 771,2851 792,2851 792,2851 792,2851 813,2851 813,2851 813,2851 834,2851 834,2851 834,2851 855,2851 855,2851 855,2851 876,2851 876,2851 876,2851 603,2872 624,2872 645,2872 666,2872 687,2872 708,2872 729,2872 750,2872 771,2872 792,2872 813,2872 834,2872 855,2872 876,2872 603,2893 624,2893 645,2893 666,2893 687,2893 708,2893 729,2893 750,2893 771,2893 792,2893 813,2893 834,2893 855,2893 876,2893 603,2914 624,2914 645,2914 666,2914 687,2914 708,2914 729,2914 750,2914 771,2914 792,2914 813,2914 834,2914 855,2914 876,2914 603,2935 624,2935 645,2935 666,2935 687,2935 708,2935 729,2935 750,2935 771,2935 792,2935 813,2935 834,2935 855,2935 876,2935 603,2956 624,2956 645,2956 666,2956 687,2956 708,2956 729,2956 750,2956 771,2956 792,2956 813,2956 834,2956 855,2956 876,2956 603,2977 624,2977 645,2977 666,2977 687,2977 708,2977 729,2977 750,2977 771,2977 792,2977 813,2977 834,2977 855,2977 876,2977 603,2998 624,2998 645,2998 666,2998 687,2998 708,2998 729,2998 750,2998 771,2998 792,2998 813,2998 834,2998 855,2998 876,2998 603,3019 624,3019 645,3019 666,3019 687,3019 708,3019 729,3019 750,3019 771,3019 792,3019 813,3019 834,3019 855,3019 876,3019 603,3040 624,3040 645,3040 666,3040 687,3040 708,3040 729,3040 750,3040 771,3040 792,3040 813,3040 834,3040 855,3040 876,3040 603,3061 624,3061 645,3061 666,3061 687,3061 708,3061 729,3061 750,3061 771,3061 792,3061 813,3061 834,3061 855,3061 876,3061 603,3082 624,3082 645,3082 666,3082 687,3082 708,3082 729,3082 750,3082 771,3082 792,3082 813,3082 834,3082 855,3082 876,3082 603,3103 624,3103 645,3103 666,3103 687,3103 708,3103 729,3103 750,3103 771,3103 792,3103 813,3103 834,3103 855,3103 876,3103 603,3124 603,3124 624,3124 624,3124 645,3124 645,3124 666,3124 666,3124 687,3124 687,3124 708,3124 708,3124 729,3124 729,3124 750,3124 750,3124 771,3124 771,3124 792,3124 792,3124 813,3124 813,3124 834,3124 834,3124 855,3124 855,3124 876,3124 876,3124
pads on no net: *.4 *.5 JP?.15 JP?.18 JP?.19 JP?.20 JP?.21 JP?.22 JP?.25 JP?.26 JP?.37 U4.1 U4.27 U4.28 U8.4
copper on no net: | length 200
  Bottom Layer w20: 2798,827 2798,927 2898,927

## Polygon pours and split planes (outlines as drawn)
GND on Bottom Layer "GND_L02_P026" (solid, pour order 26): 2978,2256 2643,2256 2306,1919 1037,1919 985,1867 985,1449 1057,1377 2366,1377 2431,1312 2423,1304 2423,578 2516,485 2636,485 2718,403 2717,402 2717,0 2978,0
AGND on Bottom Layer "AGND_L02_P024" (solid, pour order 24): 684.99,1726.86 684.99,1538.49 746.99,1476.49 746.99,1235.49 756.99,1225.49 967.99,1225.49 1061.99,1131.49 1637.99,1131.49 1828.99,940.49 2383.92,940.49 2469.99,1026.55 2469.99,1447.49 2447.99,1469.49 1854.92,1469.49 1594.23,1730.18
Power+ on Bottom Layer "NONET_L-01_P-001" (solid, remove dead copper, pour order 20): 393,572 227,406 227,52 282,-3 705,-3 819,111 819,350 623,546 623,742 410,742 393,742
Power- on Bottom Layer "NONET_L-01_P-001" (solid, remove dead copper, pour order 21): 1054,572 888,406 888,52 943,-3 1366,-3 1480,111 1480,350 1284,546 1284,725 1054,725
Red on Bottom Layer "NONET_L-01_P-001" (solid, pour order 18): 1523,312 1522,311 1522,10 2645,10 2708,73 2708,388 2632,464 2445,464 2445,457 2375,387 2375,312 2394,293 2508,293 2541,260 2541,161 2494,114 2217,114 2019,312 1538,312
VS2 on Bottom Layer "NONET_L-01_P-001" (solid, pour order 3): 495,2076 494,2077 494,3391 638,3535 1112,3535 1112,2302 876,2066 508,2066
PGND on Bottom Layer "NONET_L-01_P-001" (solid, pour order 1): 2353,3898 2354,3897 2354,3453 2313,3412 2178,3412 2105,3485 1688,3485 1601,3398 1601,2939 1713,2827 1905,2827 2159,2573 2159,2296 2158,2296 2098,2236 1367,2236 737,1606 737,1345 421,1137 255,1137 202,1190 202,1429 273,1500 273,1757 402,1886 691,1886 1112,2307 1112,3463 1547,3898 2354,3898
Vout_P on Bottom Layer "NONET_L-01_P-001" (solid, pour order 2): 487,2608 487,2071 262,1846 262,1508 189,1435 189,972 263,898 263,670 267,666 25,424 0,424 0,2710.36 0,3401 481.83,3401
VS1 on Bottom Layer "NONET_L-01_P-001" (solid, pour order 17): 358,3895 357,3894 357,3590 494,3453 520,3453 520,3465 614,3559 1157,3559 1434,3836 1434,3900
PowerSolider+ on Bottom Layer "NONET_L-01_P-001" (solid, pour order 14): 594,696 594,527 710,411 1643,411 1755,523 1755,745 1635,745 1478,588 855,588 831,612 831,696
POWER on Bottom Layer "NONET_L-01_P-001" (solid, pour order 0): 2380,3898 2380,3442 2332,3394 2157,3394 2079,3472 1697,3472 1631,3406 1631,2960 1736,2855 1975,2855 2381.84,2448.16 2381.84,2272.16 2406,2248 2478,2248 2495,2265 2495,2383 2543,2431 2806,2431 2847,2390 2847,2298 2871,2274 2978,2274 2978,3898
GND on Top Layer "GND_L01_P025" (solid, pour order 25): 2978,2256 2643,2256 2306,1919 1037,1919 985,1867 985,1449 1057,1377 2366,1377 2431,1312 2423,1304 2423,578 2516,485 2636,485 2718,403 2717,402 2717,0 2978,0
AGND on Top Layer "AGND_L01_P023" (solid, remove dead copper, pour order 23): 685,1726.37 685,1538 747,1476 747,1235 757,1225 968,1225 1062,1131 1638,1131 1829,940 2383.94,940 2470,1026.06 2470,1447 2448,1469 1854.93,1469 1594.24,1729.69
POWER on Top Layer "NONET_L-01_P-001" (solid, pour order 7): 2380,3898 2380,3442 2332,3394 2157,3394 2079,3472 1697,3472 1631,3406 1631,2960 1736,2855 1975,2855 2381.84,2448.16 2381.84,2272.16 2406,2248 2478,2248 2495,2265 2495,2383 2543,2431 2806,2431 2847,2390 2847,2298 2871,2274 2978,2274 2978,3898
PowerSolider+ on Top Layer "NONET_L-01_P-001" (solid, pour order 22): 1592,531 1616,507 1710,507 1757,554 1757,746 1592,746
Red on Top Layer "NONET_L-01_P-001" (solid, pour order 19): 1523,312 1522,311 1522,10 2645,10 2708,73 2708,388 2632,464 2445,464 2445,457 2375,387 2375,312 2394,293 2508,293 2541,260 2541,161 2494,114 2217,114 2019,312 1538,312
VS2 on Top Layer "NONET_L-01_P-001" (solid, pour order 8): 494,2236 494,3391 638,3535 1112,3535 1112,2293 1055,2236
Blue on Top Layer "NONET_L-01_P-001" (solid, pour order 15): 1324,707 1324,539 1511,352 2273.14,352 2322.14,303 2362,303 2382,323 2382,475 2253,604 2040,604 1925,489 1619,489 1489,619 1489,804 1456,837
Vout_P on Top Layer "NONET_L-01_P-001" (solid, pour order 9): 487,2608 487,2071 262,1846 262,1508 189,1435 189,972 263,898 263,670 267,666 25,424 0,424 0,2710.36 0,3434.45 481.61,3434.45
Power- on Top Layer "NONET_L-01_P-001" (solid, pour order 13): 1054,572 888,406 888,52 943,-3 1366,-3 1480,111 1480,350 1284,546 1284,742 1469,927 1469,1122 1054,1122
Power+ on Top Layer "NONET_L-01_P-001" (solid, pour order 12): 393,572 227,406 227,52 282,-3 705,-3 819,111 819,350 623,546 623,742 759,878 759,1037 732,1064 730,1062 393,1062
Vout_N on Top Layer "NONET_L-01_P-001" (solid, pour order 11): 424,1231 424,1074 456,1042 713,1042 759,996 759,799 825,733 975,733 1103,861 1103,1064 936,1231
PGND on Top Layer "NONET_L-01_P-001" (solid, remove dead copper, pour order 10): 735,1356 489,1356 414,1281 414,1187 342,1115 226,1115 193,1148 193,1408 282,1497 282,1828 584,1828 735,1677 735,1646
PGND on Top Layer "NONET_L-01_P-001" (solid, pour order 6): 1576,3896 1576,3555 1651,3480 2099,3480 2170,3409 2176,3415 2348,3415 2379,3446 2377,3448 2377,3898
VS1 on Top Layer "NONET_L-01_P-001" (solid, pour order 5): 359,3898 358,3897 358,3591 528,3421 970,3421 1221,3170 1221,2569 1536,2254 2620,2254 2651,2285 2651,2616 2131,3136 1827,3136 1531,3432 1531,3898

## Keep-outs
Keep-Out Layer:
  the board outline again, w20

## Other copper
Bottom Layer:
  region: 1632.81,342.19
  region: 1632.81,342.19
  region: 1632.81,342.19
  region: 1632.81,342.19
  region: 1632.81,342.19
  region: 1632.81,342.19
  region: 1632.81,342.19
  region: 1632.81,342.19
  region: 1632.81,342.19
  region: 1632.81,342.19
  region: 1632.81,342.19
  region: 1632.81,342.19
  region: 1632.81,342.19
  region: 1918.81,3922.19
  region: 1918.81,3922.19
  region: 1918.81,3922.19
  region: 1918.81,3922.19
  region: 1918.81,3922.19
  region: 1918.81,3922.19
  region: 1918.81,3922.19
  region: 1918.81,3922.19
  region: 1918.81,3922.19
  region: 1918.81,3922.19
  region: 1918.81,3922.19
  region: 1918.81,3922.19
  region: 1918.81,3922.19
  region: 1687.81,3922.19
  region: 1687.81,3922.19
  region: 1687.81,3922.19
  region: 1687.81,3922.19
  region: 1687.81,3922.19
  region: 1687.81,3922.19
  region: 1687.81,3922.19
  region: 1687.81,3922.19
  region: 1687.81,3922.19
  region: 1687.81,3922.19
  region: 1687.81,3922.19
  region: 1687.81,3922.19
  region: 1687.81,3922.19
  region: 2594.72,3624.46
  region: 2594.72,3624.46
  region: 2594.72,3624.46
  region: 2594.72,3624.46
  region: 2594.72,3624.46
  region: 2594.72,3624.46
  region: 2594.72,3624.46
  region: 2594.72,3624.46
  region: 2594.72,3624.46
  region: 2594.72,3624.46
  region: 2594.72,3624.46
  region: 2594.72,3624.46
  region: 2594.72,3624.46
  region: 2288.72,3213.46
  region: 2288.72,3213.46
  region: 2288.72,3213.46
  region: 2288.72,3213.46
  region: 2288.72,3213.46
  region: 2288.72,3213.46
  region: 2288.72,3213.46
  region: 2288.72,3213.46
  region: 2288.72,3213.46
  region: 2288.72,3213.46
  region: 2288.72,3213.46
  region: 2288.72,3213.46
  region: 2288.72,3213.46
  region: 690.81,2898.19
  region: 690.81,2898.19
  region: 690.81,2898.19
  region: 690.81,2898.19
  region: 690.81,2898.19
  region: 690.81,2898.19
  region: 690.81,2898.19
  region: 690.81,2898.19
  region: 690.81,2898.19
  region: 690.81,2898.19
  region: 690.81,2898.19
  region: 690.81,2898.19
  region: 690.81,2898.19
  region: 690.81,3171.19
  region: 690.81,3171.19
  region: 690.81,3171.19
  region: 690.81,3171.19
  region: 690.81,3171.19
  region: 690.81,3171.19
  region: 690.81,3171.19
  region: 690.81,3171.19
  region: 690.81,3171.19
  region: 690.81,3171.19
  region: 690.81,3171.19
  region: 690.81,3171.19
  region: 690.81,3171.19
  region: 109.81,1109.19
  region: 109.81,1109.19
  region: 109.81,1109.19
  region: 109.81,1109.19
  region: 109.81,1109.19
  region: 109.81,1109.19
  region: 109.81,1109.19
  region: 109.81,1109.19
  region: 109.81,1109.19
  region: 109.81,1109.19
  region: 109.81,1109.19
  region: 109.81,1109.19
  region: 109.81,1109.19
  region: 109.81,836.19
  region: 109.81,836.19
  region: 109.81,836.19
  region: 109.81,836.19
  region: 109.81,836.19
  region: 109.81,836.19
  region: 109.81,836.19
  region: 109.81,836.19
  region: 109.81,836.19
  region: 109.81,836.19
  region: 109.81,836.19
  region: 109.81,836.19
  region: 109.81,836.19
  region: 109.81,1508.19
  region: 109.81,1508.19
  region: 109.81,1508.19
  region: 109.81,1508.19
  region: 109.81,1508.19
  region: 109.81,1508.19
  region: 109.81,1508.19
  region: 109.81,1508.19
  region: 109.81,1508.19
  region: 109.81,1508.19
  region: 109.81,1508.19
  region: 109.81,1508.19
  region: 109.81,1508.19
  region: 109.81,1235.19
  region: 109.81,1235.19
  region: 109.81,1235.19
  region: 109.81,1235.19
  region: 109.81,1235.19
  region: 109.81,1235.19
  region: 109.81,1235.19
  region: 109.81,1235.19
  region: 109.81,1235.19
  region: 109.81,1235.19
  region: 109.81,1235.19
  region: 109.81,1235.19
  region: 109.81,1235.19
  region: 135.81,2157.19
  region: 135.81,2157.19
  region: 135.81,2157.19
  region: 135.81,2157.19
  region: 135.81,2157.19
  region: 135.81,2157.19
  region: 135.81,2157.19
  region: 135.81,2157.19
  region: 135.81,2157.19
  region: 135.81,2157.19
  region: 135.81,2157.19
  region: 135.81,2157.19
  region: 135.81,2157.19
  region: 135.81,2430.19
  region: 135.81,2430.19
  region: 135.81,2430.19
  region: 135.81,2430.19
  region: 135.81,2430.19
  region: 135.81,2430.19
  region: 135.81,2430.19
  region: 135.81,2430.19
  region: 135.81,2430.19
  region: 135.81,2430.19
  region: 135.81,2430.19
  region: 135.81,2430.19
  region: 135.81,2430.19
  region: 264.81,2960.19
  region: 264.81,2960.19
  region: 264.81,2960.19
  region: 264.81,2960.19
  region: 264.81,2960.19
  region: 264.81,2960.19
  region: 264.81,2960.19
  region: 264.81,2960.19
  region: 264.81,2960.19
  region: 264.81,2960.19
  region: 264.81,2960.19
  region: 264.81,2960.19
  region: 264.81,2960.19
  region: 150.81,3401.19
  region: 150.81,3401.19
  region: 150.81,3401.19
  region: 150.81,3401.19
  region: 150.81,3401.19
  region: 150.81,3401.19
  region: 150.81,3401.19
  region: 150.81,3401.19
  region: 150.81,3401.19
  region: 150.81,3401.19
  region: 150.81,3401.19
  region: 150.81,3401.19
  region: 150.81,3401.19
  region: 1080.81,3902.19
  region: 1080.81,3902.19
  region: 1080.81,3902.19
  region: 1080.81,3902.19
  region: 1080.81,3902.19
  region: 1080.81,3902.19
  region: 1080.81,3902.19
  region: 1080.81,3902.19
  region: 1080.81,3902.19
  region: 1080.81,3902.19
  region: 1080.81,3902.19
  region: 1080.81,3902.19
  region: 1080.81,3902.19
  region: 473.81,3902.19
  region: 473.81,3902.19
  region: 473.81,3902.19
  region: 473.81,3902.19
  region: 473.81,3902.19
  region: 473.81,3902.19
  region: 473.81,3902.19
  region: 473.81,3902.19
  region: 473.81,3902.19
  region: 473.81,3902.19
  region: 473.81,3902.19
  region: 473.81,3902.19
  region: 473.81,3902.19

## Silkscreen, mask and mechanical layers (free items; w line width, h text height)
Top Overlay:
  rectangle: 183,2458.44 2702.68,3167.1
  lines w10: 183,1986 2702.68,1986 2702.68,3167.1 183,3167.1 183,1986